# Altium PCB Steamer_PCB.PcbDoc
Units mm, origin at the board's own origin, x right, y up, seen from the top; angles counter-clockwise.
Board outline 155.7 x 137.16 mm, 2 copper layers (Top Layer, Bottom Layer); 49 components, 65 nets, 237 pads, 47 vias.
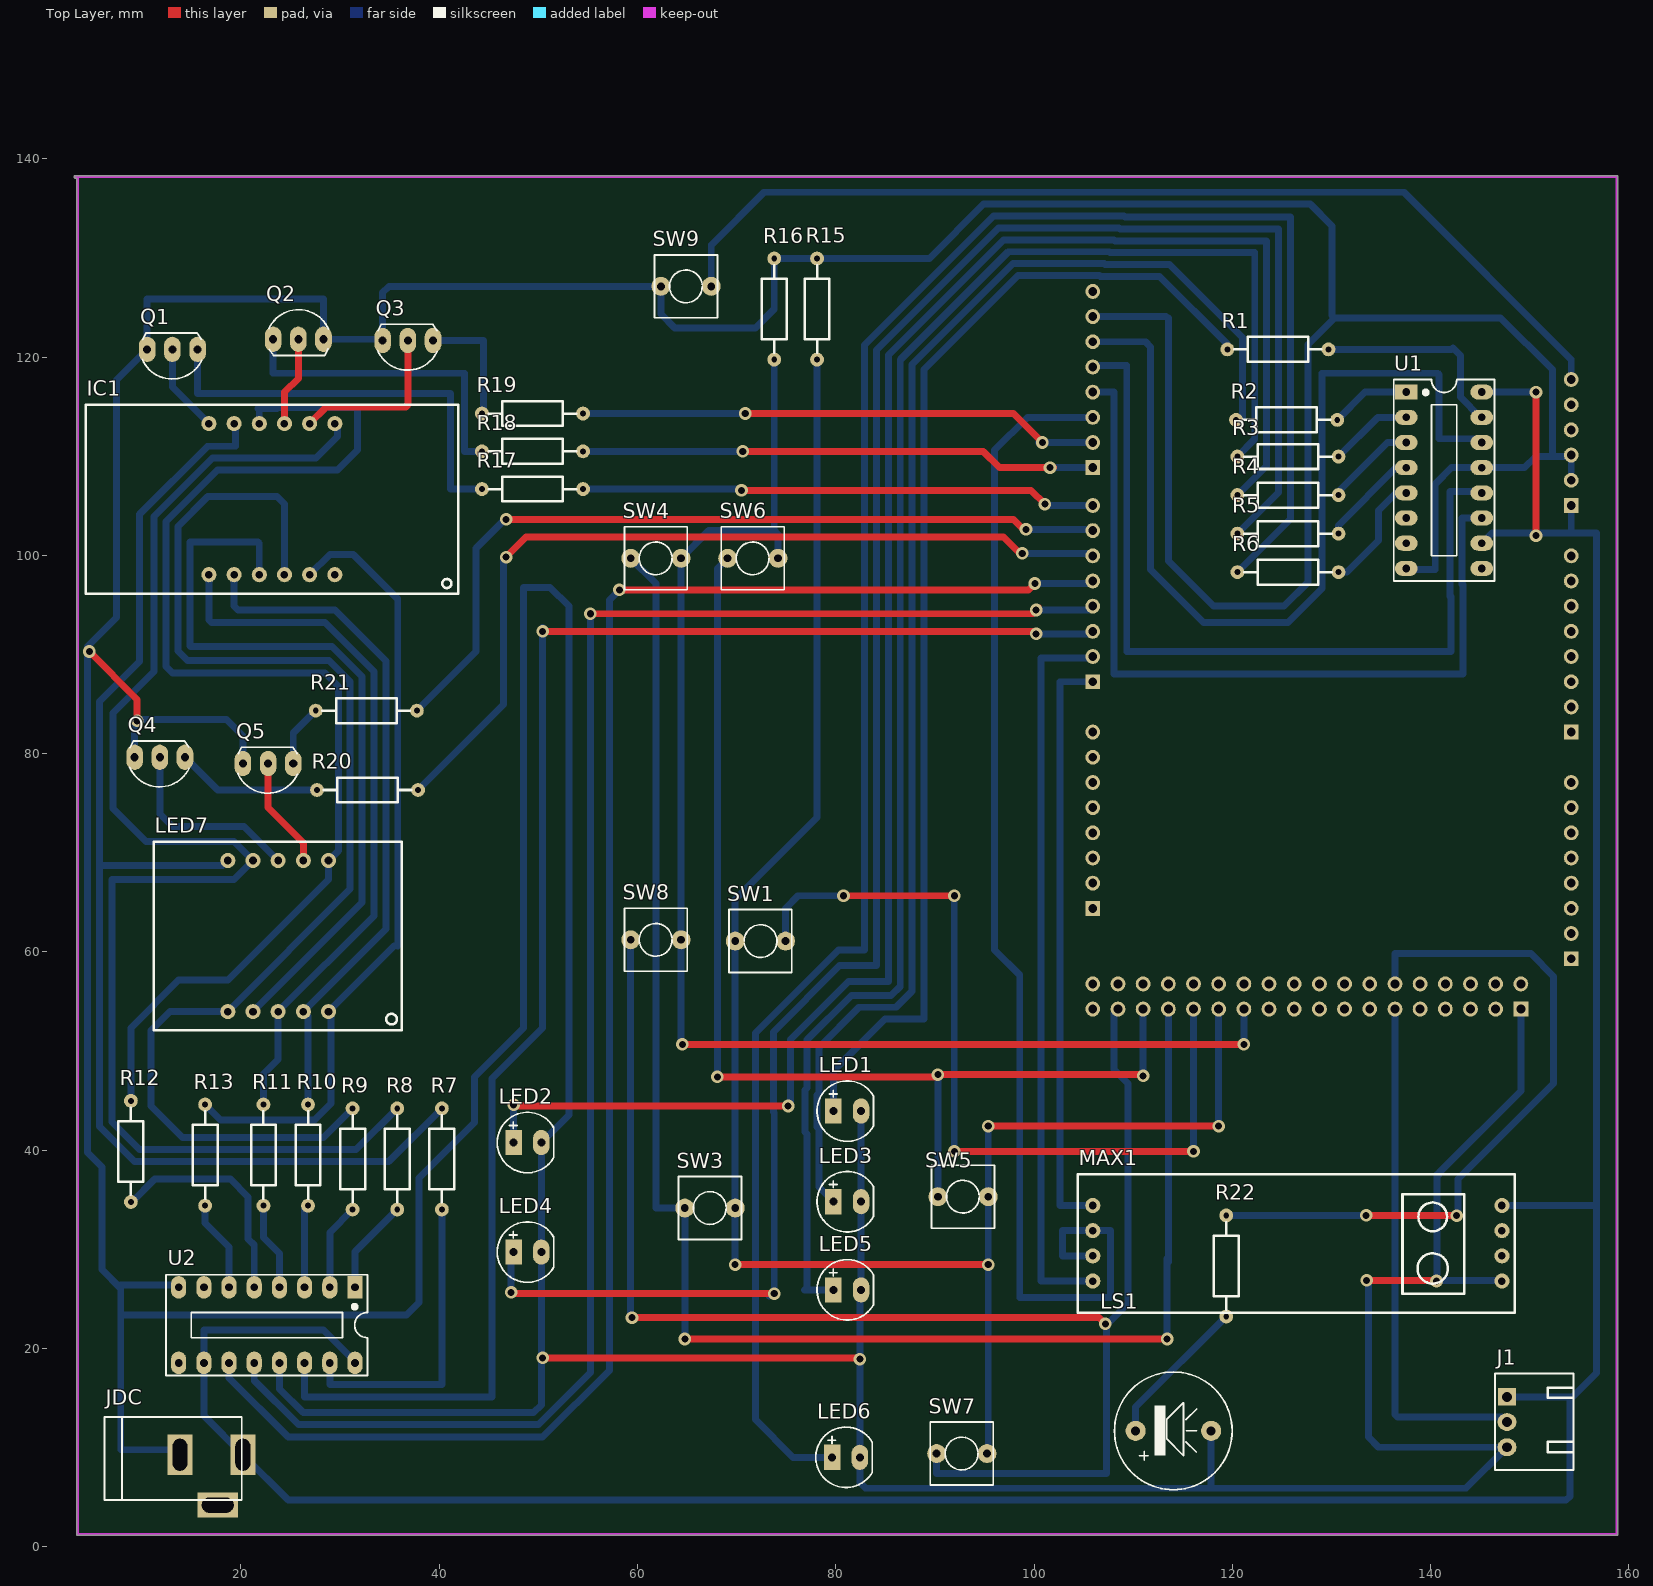
[diagram p0: Top Layer view]
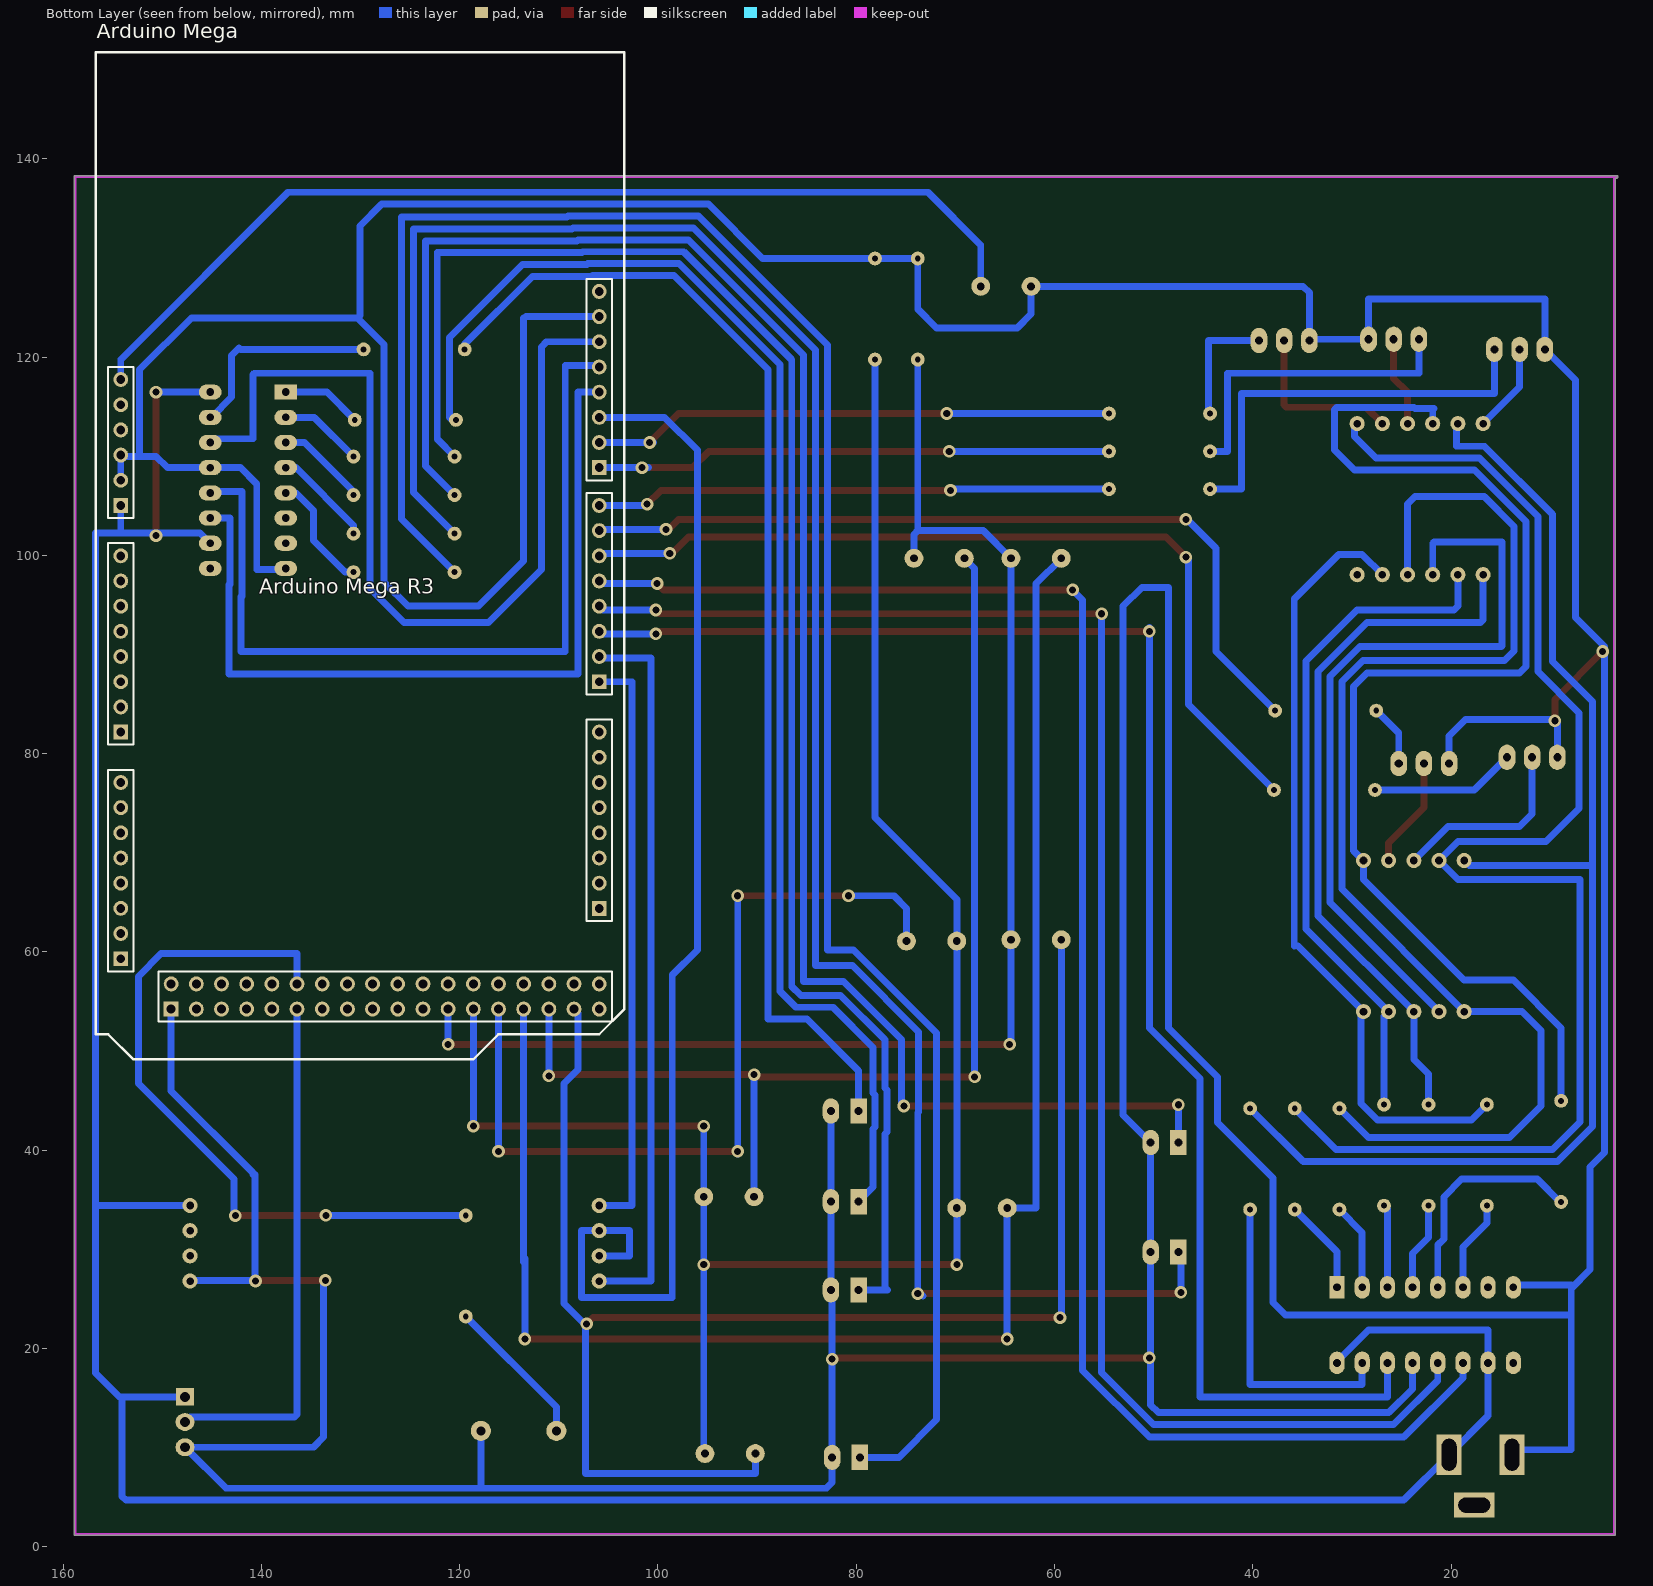
[diagram p1: Bottom Layer view, seen from below]
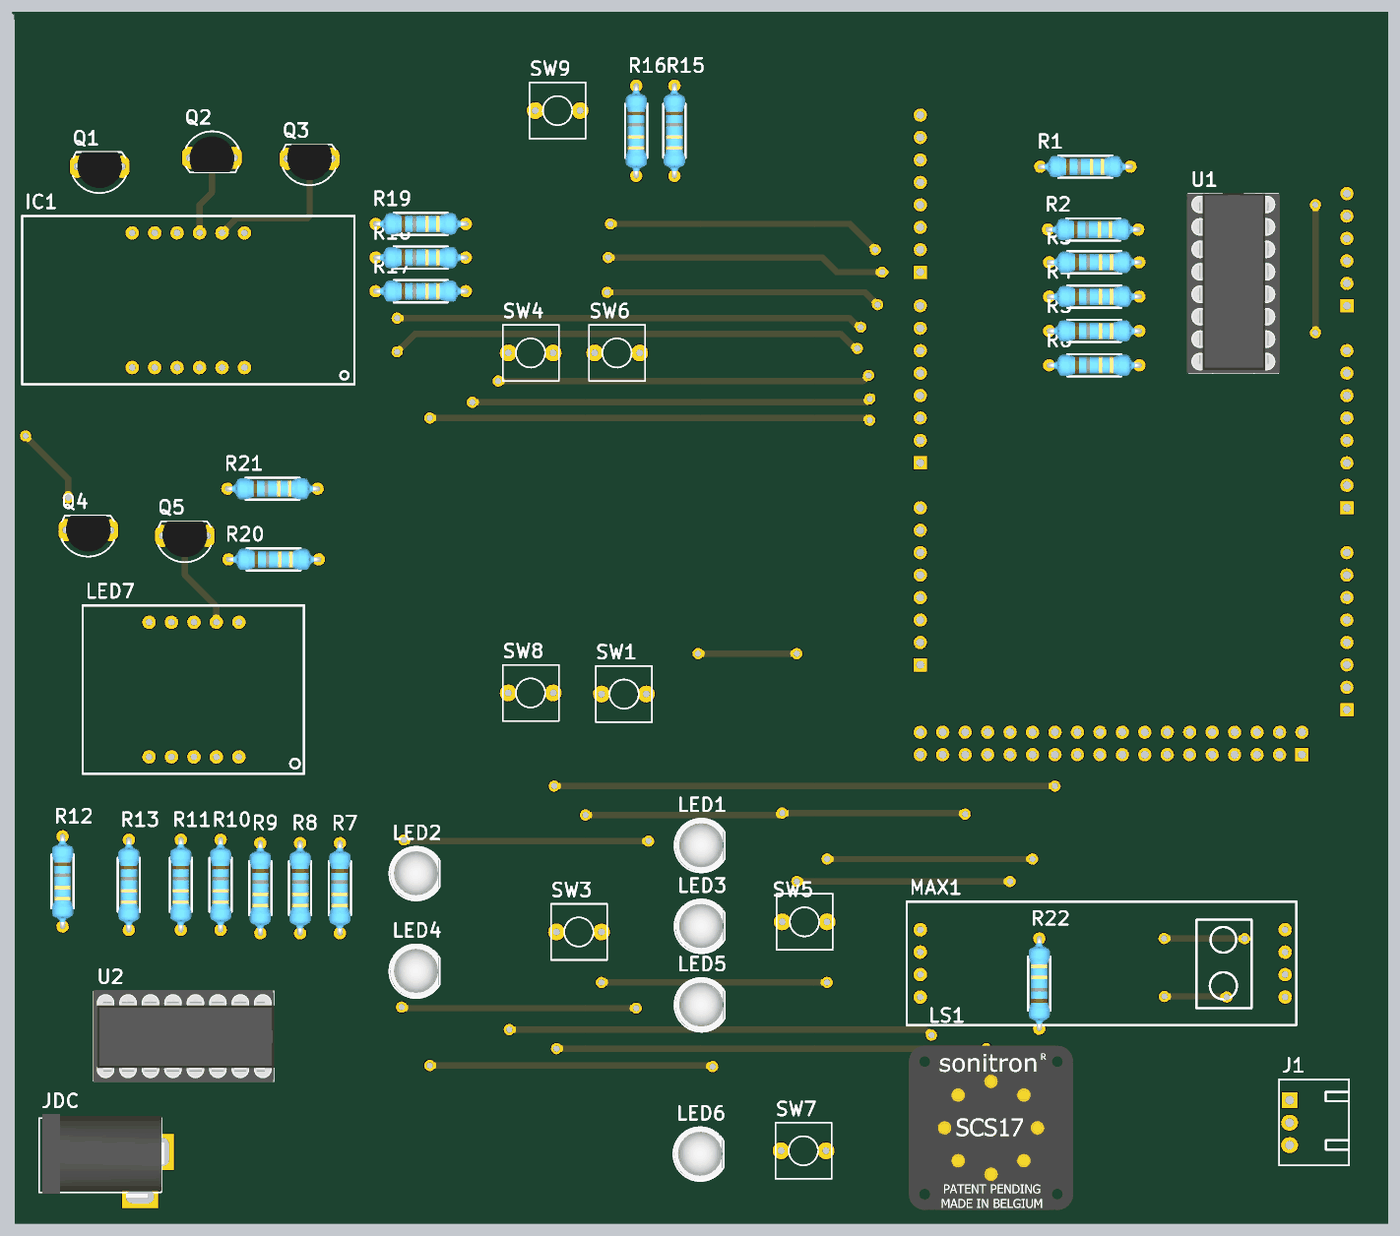
[diagram p2: 3D render of the assembled board from above, using the file's embedded part models]

## Layer stack, top to bottom
Top Solder: solder mask 0.0102, Solder Resist, Dk 3.5
Top Layer: signal copper 0.0356
Dielectric 1: dielectric 0.32, FR-4, Dk 4.8
Bottom Layer: signal copper 0.0356
Bottom Solder: solder mask 0.0102, Solder Resist, Dk 3.5

## Board outline
3.302,138.049 cw(c3.302,138.176) 3.302,138.303 158.75,138.303 cw(c158.75,138.176) 158.877,138.176 158.877,1.27 cw(c158.75,1.27) 158.75,1.143 3.556,1.143 cw(c3.556,1.27) 3.429,1.27 3.429,138.049

## Design rules (kind name [scope] priority, off if disabled: settings)
Clearance [All] p1: gap=0.5
PolygonConnect [All] p1: connectstyle=Relief reliefconductorwidth=0.254 reliefentries=4 polygonreliefangle="90 Angle" airgapwidth=0.254
RoutingVias [All] p1: holewidth=0.711 width=2.54 viastyle="Through Hole" minholewidth=0.711 minwidth=1.67 maxholewidth=0.711 maxwidth=2.54
SolderMaskExpansion [All] p1: expansion=0.102
Width [All] p1: maxlimit=1.5 minlimit=0.7 preferedwidth=0.7
30 further rules are at their usual default settings.

## Components (designator, comment, footprint, x,y, rotation, side; value= is the part's Value field where it differs from the comment)
"Arduino Mega" "ARDUINO MEGA" "ARDUINO MEGA" 128.778,97.409 r270 bottom
IC1 "Component_1" 7SEG_MPX3 16.764,98.044 r0 top
J1 "Header 1_2.54_3P" "Header_Duc Cong_3P 2.54" 147.701,15.113 r90 top
JDC "Jack DC5.5x2.1" DC-IN 17.018,6.731 r0 top
LED1 "LED 5mm Do" "LED 5mm DO" 81.153,43.942 r0 top
LED2 "LED 5mm Do" "LED 5mm DO" 48.895,40.767 r0 top
LED3 "LED 5mm Do" "LED 5mm DO" 81.153,34.798 r0 top
LED4 "LED 5mm Do" "LED 5mm DO" 48.895,29.718 r0 top
LED5 "LED 5mm Do" "LED 5mm DO" 81.153,25.908 r0 top
LED6 "LED 5mm Do" "LED 5mm DO" 81.026,9.017 r0 top
LED7 "Component_1" 5621AS_Lib 18.669,53.975 r0 top
LS1 "Còi Chip 5V 9.5x12MM" SPK 110.236,11.684 r0 top
MAX1 "Component_1" MAX485_Module 105.918,34.417 r270 top
Q1 "C1815" QTO-92 13.081,120.777 r180 top
Q2 "C1815" QTO-92 25.781,121.793 r0 top
Q3 "C1815" QTO-92 36.83,121.666 r180 top
Q4 "C1815" QTO-92 11.811,79.629 r180 top
Q5 "C1815" QTO-92 22.733,78.994 r180 top
R1 "220R" "tro vach 1/4w" 124.587,120.777 r180 top
R2 "220R" "tro vach 1/4w" 125.476,113.665 r180 top
R3 "220R" "tro vach 1/4w" 125.603,109.957 r180 top
R4 "220R" "tro vach 1/4w" 125.603,106.07 r180 top
R5 "220R" "tro vach 1/4w" 125.603,102.184 r180 top
R6 "220R" "tro vach 1/4w" 125.603,98.298 r180 top
R7 "220R" "tro vach 1/4w" 40.259,39.116 r90 top
R8 "220R" "tro vach 1/4w" 35.76,39.116 r90 top
R9 "220R" "tro vach 1/4w" 31.26,39.116 r90 top
R10 "220R" "tro vach 1/4w" 26.761,39.497 r90 top
R11 "220R" "tro vach 1/4w" 22.261,39.497 r90 top
R12 "220R" "tro vach 1/4w" 8.89,39.878 r90 top
R13 "220R" "tro vach 1/4w" 16.383,39.497 r90 top
R15 "10k" "tro vach 1/4w" 78.105,124.841 r90 top
R16 "10k" "tro vach 1/4w" 73.787,124.841 r90 top
R17 "1k" "tro vach 1/4w" 49.403,106.68 r180 top
R18 "1k" "tro vach 1/4w" 49.403,110.49 r180 top
R19 "1k" "tro vach 1/4w" 49.403,114.3 r180 top
R20 "1k" "tro vach 1/4w" 32.766,76.327 r180 top
R21 "1k" "tro vach 1/4w" 32.639,84.328 r180 top
R22 "1k" "tro vach 1/4w" 119.38,28.321 r270 top
SW1 "Nut Nhan 2 Chan ( Dip )" SW2 74.93,61.087 r180 top
SW3 "Nut Nhan 2 Chan ( Dip )" SW2 64.77,34.163 r0 top
SW4 "Nut Nhan 2 Chan ( Dip )" SW2 59.309,99.695 r0 top
SW5 "Nut Nhan 2 Chan ( Dip )" SW2 90.297,35.306 r0 top
SW6 "Nut Nhan 2 Chan ( Dip )" SW2 69.088,99.695 r0 top
SW7 "Nut Nhan 2 Chan ( Dip )" SW2 90.17,9.398 r0 top
SW8 "Nut Nhan 2 Chan ( Dip )" SW2 59.309,61.214 r0 top
SW9 "Nut Nhan 2 Chan ( Dip )" SW2 62.357,127.127 r0 top
U1 "74HC595" DIP16/W0.3 137.541,116.459 r270 top
U2 "74HC595" DIP16/W0.3 31.496,26.162 r180 top

## Footprints (in the part's own frame and the unit in brackets; to place one, negate y for a bottom-side part, rotate by r counter-clockwise, add the part's x,y. Pads: shape width x height; smd on the part's side, far side on the other; paste and mask are expansions set on the pad)
7SEG_MPX3 [mil] "5631AS Led 7 segment 3 digits"
  round 60 hole 30: 1(0,0) 2(100,0) 3(200,0) 4(300,0) 5(400,0) 6(500,0) 7(500,600) 8(400,600) 9(300,600) 10(200,600) 11(100,600) 12(0,600)
  silkscreen extent -490,-75 990,675
5621AS_Lib [mil] "LED 7-segment 2 digits"
  round 60 hole 30: 1(0,0) 2(100,0) 3(200,0) 4(300,0) 5(400,0) 6(400,600) 7(300,600) 8(200,600) 9(100,600) 10(0,600)
  silkscreen extent -295,-75 690,675
"ARDUINO MEGA" [mm] "Arduino Mega 2560"
  rect 1.5x1.5 hole 0.9: 0(10.16,22.86) 8(-11.43,22.86) 21(33.02,22.86) 59(-7.62,-25.4) 67(15.24,-25.4) 75(38.1,-25.4) 79(43.18,-20.32)
  round 1.5 hole 0.9: 1(7.62,22.86) 2(5.08,22.86) 3(2.54,22.86) 4(0,22.86) 5(-2.54,22.86) 6(-5.08,22.86) 7(-7.62,22.86) 9(-13.97,22.86) 10(-16.51,22.86) 11(-19.05,22.86) 12(-21.59,22.86) 13(-24.13,22.86) 14(15.24,22.86) 15(17.78,22.86) 16(20.32,22.86) 17(22.86,22.86) 18(25.4,22.86) 19(27.94,22.86) 20(30.48,22.86) 22(40.64,20.32) 23(43.18,20.32) 24(40.64,17.78) 25(43.18,17.78) 26(40.64,15.24) 27(43.18,15.24) 28(40.64,12.7) 29(43.18,12.7) 30(40.64,10.16) 31(43.18,10.16) 32(40.64,7.62) 33(43.18,7.62) 34(40.64,5.08) 35(43.18,5.08) 36(40.64,2.54) 37(43.18,2.54) 38(40.64,0) 39(43.18,0) 40(40.64,-2.54) 41(43.18,-2.54) 42(40.64,-5.08) 43(43.18,-5.08) 44(40.64,-7.62) 45(43.18,-7.62) 46(40.64,-10.16) 47(43.18,-10.16) 48(40.64,-12.7) 49(43.18,-12.7) 50(40.64,-15.24) 51(43.18,-15.24) 52(40.64,-17.78) 53(43.18,-17.78) 54(-20.32,-25.4) 55(-17.78,-25.4) 56(-15.24,-25.4) 57(-12.7,-25.4) 58(-10.16,-25.4) 60(-2.54,-25.4) 61(0,-25.4) 62(2.54,-25.4) 63(5.08,-25.4) 64(7.62,-25.4) 65(10.16,-25.4) 66(12.7,-25.4) 68(20.32,-25.4) 69(22.86,-25.4) 70(25.4,-25.4) 71(27.94,-25.4) 72(30.48,-25.4) 73(33.02,-25.4) 74(35.56,-25.4) 76(-26.67,22.86) 77(-29.21,22.86) 78(40.64,-20.32) 80(43.18,22.86) 81(40.64,22.86)
  silkscreen extent -53.34,-27.94 48.26,25.4
DC-IN [mm] "Jac DC input"
  rect 2.54x4.064 hole 1.5 slot 3.2 at 90 deg: 1(3.175,2.54) 2(-3.175,2.54)
  rect 4.064x2.54 hole 1.5 slot 3.2 at 0 deg: 3(0.635,-2.54)
  silkscreen extent -10.79,-2.03 3.05,6.35, body extent -10.42,-2.67 3.4,6.84, height 11.02
DIP16/W0.3 [mil] "16 PIN, W 300mil, Pin to pin 100mil"
  rect 60x90 hole 31: 1(0,0)
  oval 60x90 hole 31: 2(100,0) 3(200,0) 4(300,0) 5(400,0) 6(500,0) 7(600,0) 8(700,0) 9(700,300) 10(600,300) 11(500,300) 12(400,300) 13(300,300) 14(200,300) 15(100,300) 16(0,300)
  silkscreen extent -50,-50 750,350, body extent -52,-57 752,356, height 299
"Header_Duc Cong_3P 2.54" [mil]
  rect 70x70 hole 39.37 unplated: 1(0,0)
  oval 70x75 hole 39.37 unplated: 2(-100,0) 3(-200,0)
  silkscreen extent -290,-265 93,47
"LED 5mm DO" [mil] "LED 2 PIN, 5 ly , Only colour, pin to pin 110mil"
  rect 65x100 hole 32: 1(-55,0)
  oval 65x100 hole 32: 2(55,0)
  silkscreen extent -120,-120 104,120, body extent -116,-117 98,120, height 339
MAX485_Module [mil]
  round 60 hole 30: 1(0,0) 2(100,0) 3(200,0) 4(300,0) 5(300,1625) 6(200,1625) 7(100,1625) 8(0,1625)
  silkscreen extent -125,-60 425,1675
QTO-92 [mil] "TO-92"
  oval 66x100 hole 32: 1(-100,0) 2(0,0) 3(100,0)
  silkscreen extent -117,-65 120,118, body extent -109,-66 109,95, height 245
SPK [mil] "Speaker Chip"
  round 80 hole 35: 1(0,0) 2(300,0)
  silkscreen extent -84,-234 384,234, body extent -221,-354 511,378, height 344
SW2 [mil] "SW button 2pin, 250x 250 mil"
  round 75 hole 31: 1(0,0) 2(200,0)
  silkscreen extent -25,-125 225,125
"tro vach 1/4w" [mm]
  round 1.4 hole 0.6: 1(-5.1,0) 2(5.1,0)
  silkscreen extent -4.39,-1.25 4.42,1.25, body extent -5.38,-1.2 5.38,1.2, height 2.41

## Part data
IC1: "5631AS LED 7 Segment 3 digits"
J1 LED1 LED2 LED3 LED4 LED5 LED6 SW1 SW3 SW4 SW5 SW6 SW7 SW8 SW9: "C?m"
JDC: library part Jac_DC, "C?m"
LS1: library part "Coi Chip 5V", "C?m"
Q1 Q2 Q3 Q4 Q5 U1 U2: "Dán"
R1 R2 R3 R4 R5 R6 R7 R8 R9 R10 R11 R12 R13: library part "Tro Vach 1/4W 5% 220R", "C?m"
R15 R16: library part "Tro Vach 1/4W 5% 10k", "Cam"
R17 R18 R19 R20 R21 R22: library part "Tro Vach 1/4W 5% 1k", "C?m"

## Via types
v1: diameter 1.27, hole 0.711, Top Layer to Bottom Layer, 47 vias

## Nets (pads, with @x,y where several pads share a name; then routed paths per layer and width w, separated by ;. In a path a pad name is that pad's centre, name@x,y a point inside that pad or via, vN(x,y) a via of type N, cw(c..) or ccw(c..) an arc to the next point about the centre after c; other vN are vias at no path point)
5V: "Arduino Mega.59" J1.1 JDC.1 MAX1.8 U1.10 U1.16 U2.10 U2.16 | length 315.3
  Top Layer w0.7: v1@150.622,102.235 v1(150.622,116.459)
  Bottom Layer w0.7: U2.16@31.496,18.663 28.315,21.844 16.256,21.844 U2.10 16.256,13.208 JDC.1 24.765,4.699 153.67,4.699 154.051,5.08 154.051,15.113 ; U1.10 146.177,102.235 156.718,102.235 156.718,34.417 ; U1.16 v1(150.622,116.459) ; MAX1.8 156.718,34.417 ; J1.1 154.051,15.113 ; 154.178,102.362 154.178,105.029 ; 154.051,15.113 154.305,15.113 156.718,17.526 156.718,34.417
  other v1: 150.622,101.981
A: IC1.11 LED7.10 R7.2 | length 128.7
  Bottom Layer w0.7: LED7.10@18.161,68.707 5.733,68.707 ; IC1.11@19.431,113.157 19.431,110.998 16.637,110.998 9.779,104.14 9.779,89.281 5.733,85.235 5.733,68.707 ; R7.2 34.905,38.862 9.271,38.862 5.733,42.4 5.733,68.707
B: IC1.7 LED7.9 R8.2 | length 141.8
  Bottom Layer w0.7: IC1.7 29.718,113.03 29.718,111.965 27.551,109.798 17.134,109.798 11.246,103.91 11.246,88.276 7.075,84.105 7.075,74.459 10.414,71.12 19.304,71.12 LED7.9 19.304,67.31 6.985,67.31 6.985,42.845 9.768,40.062 31.606,40.062 R8.2
BUZZER: "Arduino Mega.44" R22.1 | length 71
  Top Layer w0.7: v1(133.497,33.421) v1@142.347,33.421
  Bottom Layer w0.7: R22.1 v1(133.497,33.421) ; 136.398,56.769 136.398,59.817 150.114,59.817 152.4,57.531 152.4,46.736 142.748,37.084 v1@142.748,33.528
  other v1: 142.621,33.401
C: IC1.4 LED7.1 R9.2 | length 128.1
  Bottom Layer w0.7: IC1.4 24.384,105.156 23.622,105.918 16.648,105.918 13.646,102.916 13.646,90.367 14.605,89.408 28.888,89.408 31.014,87.282 31.014,66.32 LED7.1 12.827,53.975 10.922,52.07 10.922,44.45 14.11,41.262 28.306,41.262 R9.2
C1: "Arduino Mega.31" R15.1 SW1.2 SW3.2 SW5.2 SW7.2 | length 187.8
  Top Layer w0.7: v1(69.85,28.448) v1(95.377,28.448) ; v1(95.377,42.418) v1(118.618,42.418)
  Bottom Layer w0.7: v1(69.85,28.448) SW3.2 ; SW3.2@69.85,34.544 SW1.2 69.85,65.278 78.105,73.533 R15.1 ; SW7.2@95.377,9.525 SW5.2 v1(95.377,42.418) ; v1(118.618,42.418) 118.618,54.229
C2: "Arduino Mega.33" R16.1 SW4.2 SW6.2 SW8.2 | length 140.2
  Top Layer w0.7: v1@64.262,50.673 v1(121.158,50.673)
  Bottom Layer w0.7: v1@64.389,50.673 SW8.2 SW4.2 67.183,102.489 73.787,102.489 ; R16.1 73.787,102.489 ; SW6.2 74.168,102.108 73.787,102.489 ; 121.158,54.229 121.158,51.054 v1@121.412,50.8
  other v1: 64.516,50.673
D: IC1.2 LED7.4 R10.2 | length 68.5
  Bottom Layer w0.7: IC1.2 19.304,94.869 19.685,94.488 29.464,94.488 34.614,89.338 34.614,62.3 LED7.4 ; R10.2 LED7.4@26.761,53.503
DE_RE: "Arduino Mega.10" MAX1.2 MAX1.3 | length 124.1
  Bottom Layer w0.7: MAX1.3 102.87,29.337 102.87,31.877 MAX1.2 107.696,31.877 107.696,25.146 98.552,25.146 98.552,57.658 96.012,60.198 96.012,110.617 99.314,113.919 105.918,113.919
DI1: IC1.12 Q1.2 | length 9
  Bottom Layer w0.7: Q1.2 13.081,116.967 IC1.12
DI2: IC1.9 Q2.2 | length 9.1
  Top Layer w0.7: IC1.9 24.384,116.459 25.781,117.856 Q2.2
DI3: IC1.8 Q3.2 | length 17.2
  Top Layer w0.7: IC1.8 28.575,114.935 36.576,114.935 36.83,115.189 Q3.2
DIGIT1: LED7.8 Q4.2 | length 19.6
  Bottom Layer w0.7: Q4.2 11.811,73.914 13.081,72.644 20.32,72.644 LED7.8
DIGIT2: LED7.7 Q5.2 | length 11.3
  Top Layer w0.7: Q5.2 22.733,74.549 26.289,70.993 LED7.7
DIO: "Arduino Mega.2" U2.14 | length 157.2
  Top Layer w0.7: v1(50.419,92.329) v1@100.076,92.329
  Bottom Layer w0.7: U2.14 26.416,15.078 45.339,15.078 45.339,47.244 50.419,52.324 v1(50.419,92.329) v1@50.419,92.71 ; v1(100.203,92.075) 105.664,92.075
DIO2: "Arduino Mega.13" U1.14 | length 93.4
  Bottom Layer w0.7: 105.918,121.539 111.252,121.539 111.76,121.031 111.76,98.552 117.094,93.218 125.603,93.218 129.032,96.647 129.032,118.364 140.716,118.364 140.843,118.237 140.843,111.76 U1.14@144.78,111.76
DP: IC1.3 LED7.2 | length 77.7
  Bottom Layer w0.7: LED7.2 32.214,64.98 32.214,87.779 29.188,90.805 14.905,90.805 14.846,90.864 14.846,101.346 21.717,101.346 21.844,101.219 IC1.3
DS18B20: "Arduino Mega.45" J1.2 | length 52.5
  Bottom Layer w0.7: 136.398,54.229 136.398,13.335 136.652,13.081 147.193,13.081 J1.2
E: IC1.1 LED7.3 R11.2 | length 71.7
  Bottom Layer w0.7: IC1.1 16.764,93.472 17.018,93.218 28.472,93.218 33.414,88.276 33.414,63.64 LED7.3 23.749,49.149 22.261,47.661 R11.2
F: IC1.10 LED7.6 R12.2 | length 124.3
  Bottom Layer w0.7: R12.2 8.89,52.324 13.716,57.15 18.669,57.15 28.829,67.31 LED7.6 29.814,70.2 29.814,86.785 28.461,88.138 13.081,88.138 12.446,88.773 12.446,103.413 17.631,108.598 29.731,108.598 31.75,110.617 31.75,114.681 31.535,114.896 23.716,114.896 23.628,114.808 21.717,114.808 21.844,114.681 IC1.10
G: IC1.5 LED7.5 R13.2 | length 79.3
  Bottom Layer w0.7: R13.2 17.933,43.047 27.403,43.047 29.083,44.727 29.083,53.721 LED7.5 35.433,60.579 ; IC1.5 28.956,100.076 31.325,100.076 35.814,95.587 35.814,60.579
GND: "Arduino Mega.57" "Arduino Mega.58" "Arduino Mega.76" "Arduino Mega.79" J1.3 JDC.2 LED1.2 LED2.2 LED3.2 LED4.2 LED5.2 LED6.2 LS1.2 MAX1.5 Q1.3 Q2.3 Q3.3 Q4.3 Q5.3 R15.2 R16.2 SW9.1 U1.8 U1.13 U2.8 U2.13 | length 889
  Top Layer w0.7: v1(4.699,90.297) 9.525,85.471 v1(9.525,83.312) ; v1(50.419,19.05) v1@82.296,19.05 ; v1(133.541,26.86) v1@140.589,26.86
  Bottom Layer w0.7: Q4.3 9.271,83.058 v1(9.525,83.312) 9.652,83.439 18.542,83.439 20.193,81.788 Q5.3 ; U2.8@13.462,26.416 7.874,26.416 7.874,26.035 ; JDC.2 13.335,9.779 7.874,9.779 7.874,23.368 ; U2.13 23.876,15.921 26.278,13.519 49.506,13.519 50.292,14.305 LED4.2 LED2.2 53.086,43.561 53.086,94.869 51.181,96.774 48.514,96.774 48.514,52.324 43.561,47.371 43.561,42.799 37.973,37.211 37.973,24.638 36.703,23.368 7.874,23.368 ; Q3.3 Q3.3@34.29,121.793 ; LED1.2 LED3.2 LED5.2 82.423,25.781 LED6.2 82.423,6.477 83.001,5.899 143.567,5.899 J1.3 134.747,10.033 133.731,11.049 133.731,26.67 v1(133.541,26.86) ; 105.918,124.079 113.284,124.079 ; 113.538,123.952 113.538,99.441 118.11,94.869 125.222,94.869 127.635,97.282 127.635,121.285 130.302,123.952 ; 117.856,6.096 LS1.2 ; U1.8@137.668,98.552 140.462,98.552 140.462,107.188 142.113,108.839 U1.13 149.479,108.839 150.622,109.982 152.273,109.982 ; 140.659,37.535 140.659,26.867 MAX1.5@147.123,26.867 ; 140.843,37.535 140.843,37.719 149.098,45.974 149.098,54.229 ; 154.051,109.982 152.273,109.982 ; 154.178,107.569 154.178,109.982 ; 7.874,23.368 7.874,26.035 ; 7.874,26.035 5.969,27.94 5.969,38.308 4.533,39.744 4.533,90.823 7.436,93.726 7.436,117.672 Q1.3 10.541,125.857 28.321,125.857 Q2.3 Q3.3@34.29,121.793 ; Q3.3@34.29,121.793 34.29,126.492 34.925,127.127 SW9.1 62.357,124.333 63.754,122.936 71.882,122.936 73.787,124.841 R16.2 R15.2 89.428,129.941 94.906,135.419 127.852,135.419 130.048,133.223 130.048,124.206 130.302,123.952 ; 130.302,123.952 147.066,123.952 152.273,118.745 152.273,109.982
  other v1: 82.423,18.923 140.589,26.797
H: 
"NetArduino Mega_54": "Arduino Mega.54" SW9.2 | length 102.1
  Bottom Layer w0.7: SW9.2 67.437,131.318 72.738,136.619 137.32,136.619 154.178,119.761 154.178,117.729
NetLS1_1: LS1.1 R22.2 | length 15.3
  Bottom Layer w0.7: LS1.1 110.236,14.077 R22.2
NetQ1_1: Q1.1 R17.2 | length 42.8
  Bottom Layer w0.7: Q1.1 15.621,116.332 41.148,116.332 41.148,106.68 R17.2
NetQ2_1: Q2.1 R18.2 | length 32.4
  Bottom Layer w0.7: Q2.1 23.241,118.364 42.545,118.364 42.545,110.49 R18.2
NetQ3_1: Q3.1 R19.2 | length 12.4
  Bottom Layer w0.7: Q3.1 44.45,121.666 R19.2@44.45,114.3
NetQ4_1: Q4.1 R20.2 | length 14.7
  Bottom Layer w0.7: Q4.1 17.653,76.327 R20.2
NetQ5_1: Q5.1 R21.2 | length 6.3
  Bottom Layer w0.7: Q5.1 25.273,82.062 R21.2
NetR1_1: R1.1 U1.15 | length 20.6
  Bottom Layer w0.7: R1.1 142.113,120.777 ; 142.24,120.904 143.002,120.142 143.002,115.957 U1.15@145.04,113.919
NetR2_1: R2.1 U1.1 | length 8.1
  Bottom Layer w0.7: R2.1 133.37,116.459 U1.1
NetR3_1: R3.1 U1.2 | length 8.5
  Bottom Layer w0.7: R3.1 134.665,113.919 U1.2
NetR4_1: R4.1 U1.3 | length 9.3
  Bottom Layer w0.7: R4.1 130.703,106.446 135.636,111.379 U1.3
NetR5_1: R5.1 U1.4 | length 9.1
  Bottom Layer w0.7: R5.1 130.703,103.017 U1.4@136.525,108.839
NetR6_1: R6.1 U1.5 | length 11.9
  Bottom Layer w0.7: R6.1 131.572,98.298 134.747,101.473 134.747,104.521 136.525,106.299 U1.5
NetR7_1: R7.1 U2.15 | length 31
  Bottom Layer w0.7: 28.956,16.383 U2.15 ; 29.083,16.383 40.259,16.383 R7.1
NetR8_1: R8.1 U2.1 | length 9.6
  Bottom Layer w0.7: U2.1 31.496,29.752 R8.1
NetR9_1: R9.1 U2.2 | length 8.8
  Bottom Layer w0.7: U2.2 28.956,31.712 R9.1
NetR10_1: R10.1 U2.3 | length 8.4
  Bottom Layer w0.7: U2.3 26.416,34.052 R10.1
NetR11_1: R11.1 U2.4 | length 8.9
  Bottom Layer w0.7: R11.1 22.261,31.206 23.876,29.591 U2.4
NetR12_1: R12.1 U2.5 | length 22.9
  Bottom Layer w0.7: R12.1 8.997,34.778 11.303,37.084 18.923,37.084 20.711,35.296 20.711,31.059 21.336,30.434 U2.5
NetR13_1: R13.1 U2.6 | length 9.2
  Bottom Layer w0.7: R13.1 16.383,32.639 18.796,30.226 U2.6
NetR14_1: U2.7
OFF: LED5.1 R3.2 | length 164.9
  Bottom Layer w0.7: LED5.1 76.835,25.908 77.089,26.162 77.089,41.614 76.88,41.823 76.88,46.061 77.089,46.27 77.089,51.135 81.567,55.613 85.587,55.613 86.5,56.526 86.5,119.728 97.391,130.619 107.575,130.619 107.669,130.525 122.257,130.525 122.257,111.711 R3.2
ON_OFF: LED6.1 R6.2 | length 210.3
  Bottom Layer w0.7: LED6.1 75.692,9.017 71.882,12.827 71.882,51.816 80.264,60.198 82.9,60.198 82.9,121.219 95.9,134.219 109.066,134.219 109.16,134.125 125.857,134.125 125.857,103.652 R6.2
R1: "Arduino Mega.23" SW7.1 SW8.1 | length 153.2
  Top Layer w0.7: v1(59.436,23.114) 106.553,23.114 v1@107.315,22.352
  Bottom Layer w0.7: v1@59.309,23.368 SW8.1 ; SW7.1 90.17,7.366 107.315,7.366 107.315,22.352 109.474,24.511 109.474,46.736 108.077,48.133 108.077,53.848
  other v1: 107.188,22.479
R2: "Arduino Mega.25" SW5.1 SW6.1 | length 114.4
  Top Layer w0.7: v1(68.047,47.396) v1@90.068,47.396 ; v1(90.297,47.625) 110.871,47.625 v1(110.998,47.498)
  Bottom Layer w0.7: v1(68.047,47.396) 68.047,98.654 SW6.1 ; SW5.1 v1@90.297,47.371 ; v1@110.998,47.371 110.998,54.229
R3: "Arduino Mega.27" SW3.1 SW4.1 | length 165
  Top Layer w0.7: v1(64.77,20.955) v1(113.411,20.955)
  Bottom Layer w0.7: SW4.1 61.849,97.155 61.849,34.163 SW3.1 v1(64.77,20.955) ; v1(113.411,20.955) 113.411,29.083 ; 113.538,28.702 113.538,54.229
R4: "Arduino Mega.29" SW1.1 | length 85.5
  Top Layer w0.7: v1(80.772,65.659) v1(91.948,65.659) ; v1(91.948,39.878) v1(116.078,39.878)
  Bottom Layer w0.7: SW1.1 74.93,64.389 76.2,65.659 v1(80.772,65.659) v1@81.026,65.659 ; v1@91.948,39.624 v1(91.948,39.878) v1(91.948,65.659) ; v1@116.078,40.005 116.078,54.229
RCLK: "Arduino Mega.3" U2.12 | length 167.1
  Top Layer w0.7: v1(55.245,94.107) 99.822,94.107 v1(100.203,94.488) v1@100.457,94.742
  Bottom Layer w0.7: U2.12 21.336,16.764 25.781,12.319 50.003,12.319 55.245,17.561 v1(55.245,94.107) ; v1(100.203,94.488) 105.537,94.488
RCLK2: "Arduino Mega.12" U1.12 | length 84.3
  Bottom Layer w0.7: 106.045,119.126 109.347,119.126 109.347,90.297 142.043,90.297 142.043,95.867 141.968,95.867 141.968,106.426 145.034,106.426 U1.12
RX: "Arduino Mega.0" MAX1.1 | length 59.2
  Bottom Layer w0.7: 102.616,87.249 102.616,34.417 MAX1.1 ; 102.87,87.249 105.918,87.249
SCLK: "Arduino Mega.4" U2.11 | length 172.3
  Top Layer w0.7: v1@57.912,96.52 v1(58.166,96.52) 99.441,96.52 v1(100.076,97.155)
  Bottom Layer w0.7: U2.11 18.796,17.018 24.765,11.049 50.43,11.049 57.15,17.769 57.15,95.504 v1(58.166,96.52) ; v1(100.076,97.155) 105.664,97.155
SCLK2: "Arduino Mega.11" U1.11 | length 83.6
  Bottom Layer w0.7: 105.918,116.459 108.077,116.459 108.077,88.011 143.243,88.011 143.243,97.067 143.168,97.067 143.168,103.759 U1.11
START: LED2.1 R4.2 | length 183.3
  Top Layer w0.7: v1@47.879,44.45 v1(75.184,44.45)
  Bottom Layer w0.7: LED2.1 v1@47.498,44.831 ; v1@75.438,44.577 75.438,51.181 81.28,57.023 85.3,57.023 85.3,120.225 96.894,131.819 108.072,131.819 108.166,131.725 123.457,131.725 123.457,109.024 R4.2
  other v1: 47.498,44.577
STOP: LED4.1 R5.2 | length 210.4
  Top Layer w0.7: v1@47.498,25.527 v1(73.787,25.527)
  Bottom Layer w0.7: v1(47.244,25.654) LED4.1@47.244,29.464 ; v1@73.279,25.273 73.787,25.781 73.787,43.747 73.699,43.835 73.699,51.936 80.38,58.617 84.1,58.617 84.1,120.722 96.397,133.019 108.569,133.019 108.663,132.925 124.657,132.925 124.657,106.338 R5.2
TE1: "Arduino Mega.7" R17.1 | length 51.4
  Top Layer w0.7: v1(70.485,106.553) 99.695,106.553 v1(101.092,105.156)
  Bottom Layer w0.7: R17.1 v1@70.231,106.68 ; v1@101.473,105.029 105.918,105.029
TE2: "Arduino Mega.8" R18.1 | length 53.1
  Top Layer w0.7: v1(70.612,110.49) 94.869,110.49 96.52,108.839 v1@101.981,108.839
  Bottom Layer w0.7: R18.1 v1(70.612,110.49) ; v1@100.965,108.839 105.918,108.839
  other v1: 101.6,108.839
TE3: "Arduino Mega.9" R19.1 | length 53.2
  Top Layer w0.7: v1(70.866,114.3) 97.917,114.3 v1(100.838,111.379)
  Bottom Layer w0.7: R19.1 v1(70.866,114.3) v1@70.993,114.173 ; v1@100.457,111.379 v1(100.838,111.379) 105.918,111.379
TEMP: LED1.1 R1.2 | length 118.8
  Bottom Layer w0.7: LED1.1 79.756,48.006 84.963,53.213 88.9,53.213 88.9,118.734 98.385,128.219 106.581,128.219 106.675,128.125 112.649,128.125 119.487,121.287 R1.2
TI1: "Arduino Mega.5" R20.1 | length 87.1
  Top Layer w0.7: v1(46.736,99.822) 48.768,101.854 96.901,101.854 v1@98.425,100.33
  Bottom Layer w0.7: R20.1 46.482,84.943 v1@46.482,99.822 ; v1(98.806,100.203) 105.664,100.203
TI2: "Arduino Mega.6" R21.1 | length 81.5
  Top Layer w0.7: v1(46.736,103.632) 97.917,103.632 v1@98.679,102.87
  Bottom Layer w0.7: R21.1 43.688,90.277 43.688,100.711 v1@46.355,103.378 ; v1(99.187,102.616) 105.791,102.616
TIME: LED3.1 R2.2 | length 140.3
  Bottom Layer w0.7: LED3.1 78.289,36.265 78.289,42.111 78.08,42.32 78.08,45.564 78.289,45.773 78.289,50.349 82.353,54.413 86.084,54.413 87.7,56.029 87.7,119.231 97.888,129.419 107.078,129.419 107.172,129.325 113.665,129.325 121.037,121.953 121.037,120.135 121.031,120.129 121.031,113.919 R2.2@120.777,113.665
TX: "Arduino Mega.1" MAX1.4 | length 73.3
  Bottom Layer w0.7: MAX1.4 100.711,26.797 100.711,89.662 105.918,89.662
pads on no net: "Arduino Mega.14" "Arduino Mega.15" "Arduino Mega.16" "Arduino Mega.17" "Arduino Mega.18" "Arduino Mega.19" "Arduino Mega.20" "Arduino Mega.21" "Arduino Mega.22" "Arduino Mega.24" "Arduino Mega.26" "Arduino Mega.28" "Arduino Mega.30" "Arduino Mega.32" "Arduino Mega.34" "Arduino Mega.35" "Arduino Mega.36" "Arduino Mega.37" "Arduino Mega.38" "Arduino Mega.39" "Arduino Mega.40" "Arduino Mega.41" "Arduino Mega.42" "Arduino Mega.43" "Arduino Mega.46" "Arduino Mega.47" "Arduino Mega.48" "Arduino Mega.49" "Arduino Mega.50" "Arduino Mega.51" "Arduino Mega.52" "Arduino Mega.53" "Arduino Mega.55" "Arduino Mega.56" "Arduino Mega.60" "Arduino Mega.61" "Arduino Mega.62" "Arduino Mega.63" "Arduino Mega.64" "Arduino Mega.65" "Arduino Mega.66" "Arduino Mega.67" "Arduino Mega.68" "Arduino Mega.69" "Arduino Mega.70" "Arduino Mega.71" "Arduino Mega.72" "Arduino Mega.73" "Arduino Mega.74" "Arduino Mega.75" "Arduino Mega.77" "Arduino Mega.78" "Arduino Mega.80" "Arduino Mega.81" IC1.6 JDC.3 MAX1.6 MAX1.7 U1.6 U1.7 U1.9 U2.9

## Keep-outs
Keep-Out Layer:
  lines w0.254: 3.302,138.176 158.75,138.176 158.75,1.27 3.556,1.27 3.556,138.176

## Text inside footprints (layer, text, board x,y; h text height)
"Arduino Mega": Bottom Overlay "Arduino Mega R3" at 140.208,96.139 h1.52